# Altium PCB GPS_1.2.PcbDoc (part 2 of 2)
Units mil, origin at the board's own origin, x right, y up, seen from the top; angles counter-clockwise.
Board outline 1890 x 2770 mil, 4 copper layers (Top Layer, GND, VDD, Bottom Layer); 61 components, 50 nets, 274 pads, 157 vias.
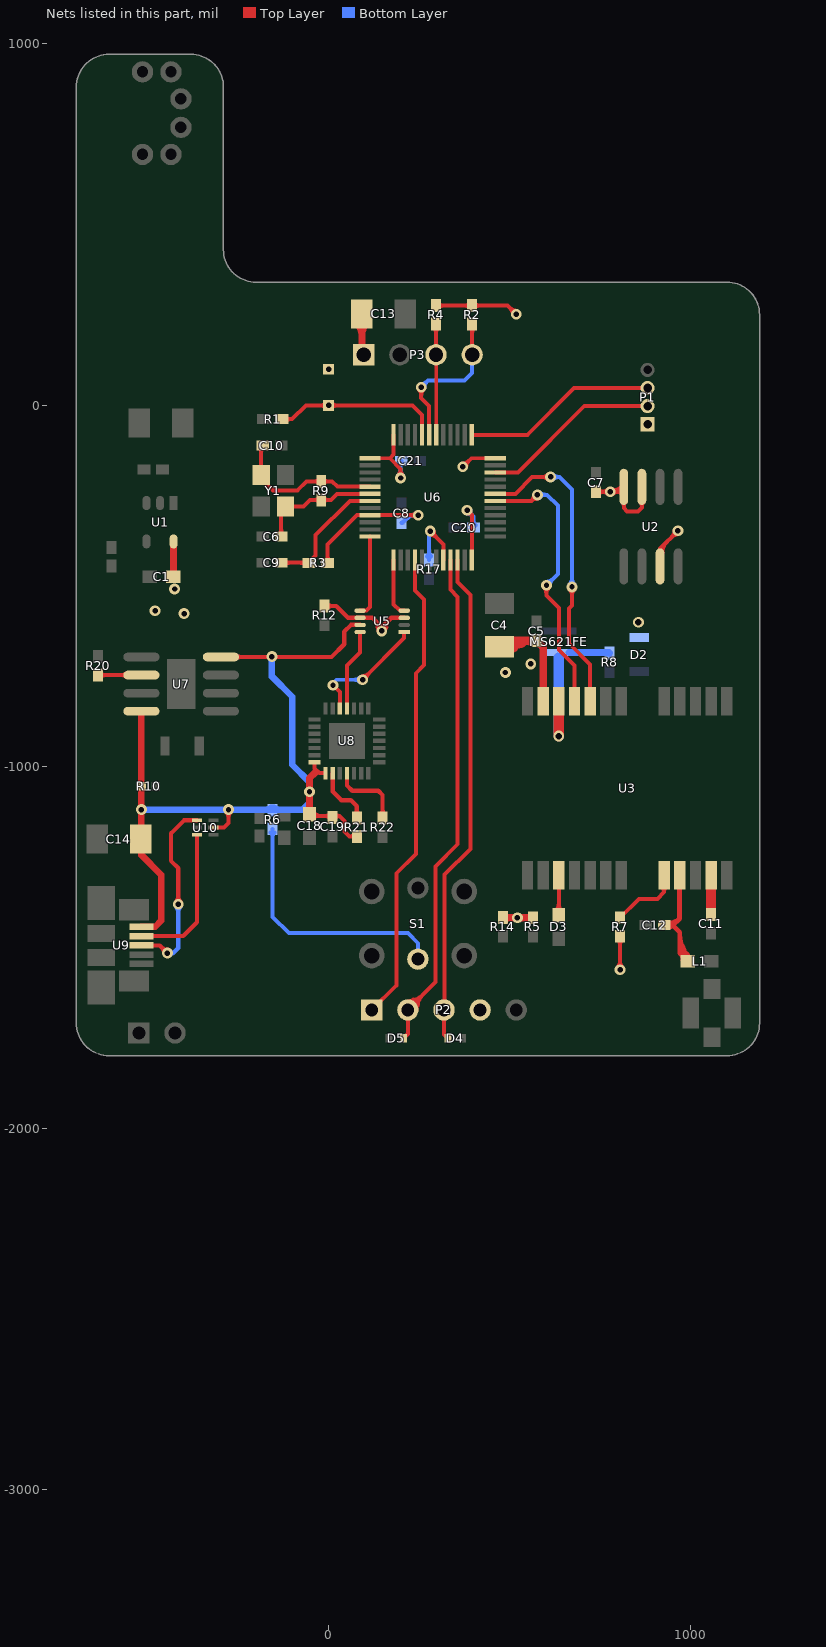
[diagram p4: the nets of this part, all layers, seen from the top]

## Via types
v1: diameter 30, hole 15, Top Layer to Bottom Layer, 153 vias
v2: diameter 30, hole 18, Top Layer to Bottom Layer, 4 vias

## Nets (pads, with @x,y where several pads share a name; then routed paths per layer and width w, separated by ;. In a path a pad name is that pad's centre, name@x,y a point inside that pad or via, vN(x,y) a via of type N, cw(c..) or ccw(c..) an arc to the next point about the centre after c; other vN are vias at no path point) (continued)
NetD3_2: D3.2 U3.3 | length 201.4
  Top Layer w11: D3.2@636.61,-1409.7 U3.3@636.61,-1299.32 ; D3.2@627.51,-1399.33 ccw(c605.55,-1377.36) 636.61,-1377.36 cw(c605.55,-1377.36) D3.2@627.51,-1399.33 ; 636.61,-1380.33 ccw(c663.49,-1380.33) 644.49,-1399.33 cw(c663.49,-1380.33) 636.61,-1380.33
NetMS621FE_2: MS621FE.2 R8.2 U3.22 | length 425.5
  Top Layer w30: v2(636.61,-914.61) U3.22@636.61,-819
  Bottom Layer w20: MS621FE.2@664.5,-683.5 775.09,-683.5 R8.2@777,-685.41
  Bottom Layer w30: v2(636.61,-914.61) 636.61,-698
NetR1_1: pad.1 R1.1 U6.44 | length 603.6
  Top Layer w11: R1.1@-128.81,-38 -101,-38 -63,0 232,0 258.2,-26.2 U6.44@258.2,-81.35 ; pad.1@-6.72,-6.72 ccw(c-22.94,-22.93) -22.94,0 ccw(c-22.94,22.93) pad.1@-6.72,6.72 ; pad.1@6.72,-6.72 cw(c22.94,-22.93) 22.94,0 cw(c22.94,22.93) pad.1@6.72,6.72 ; -104.89,-38 cw(c-104.89,-18.01) -119.02,-32.15 ccw(c-104.89,-18.01) -104.89,-38 ; -104.89,-38 ccw(c-104.89,-57.99) -119.02,-43.85 cw(c-104.89,-57.99) -104.89,-38
NetR6_2: R6.2 S1.6 | length 782.6
  Bottom Layer w11: R6.2@-155,-1171.18 -155,-1415 -110,-1460 219,-1460 246.88,-1487.88 S1.6@246.88,-1531.83 ; -155,-1195.11 cw(c-135.01,-1195.11) -149.15,-1180.97 ccw(c-135.01,-1195.11) -155,-1195.11 ; -155,-1195.11 ccw(c-174.99,-1195.11) -160.85,-1180.97 cw(c-174.99,-1195.11) -155,-1195.11
NetR7_1: R7.1 U3.8 | length 268.1
  Top Layer w11: R7.1@806,-1417.32 858.31,-1365 909,-1365 927.95,-1346.05 ; U3.8@927.95,-1299.32 927.95,-1346.05 ; 927.95,-1346.05 cw(c948.88,-1346.05) 934.83,-1330.53 ccw(c948.88,-1346.05) 927.95,-1346.05 ; 927.95,-1346.05 ccw(c907.02,-1346.05) 921.07,-1330.53 cw(c907.02,-1346.05) 927.95,-1346.05
NetR17_1: R17.1 U6.20 | length 327.8
  Top Layer w11: v1@279.53,-348.3 ccw(c294.61,-345.21) 290.62,-360.08 ; v1(281,-348) 317.26,-384.26 U6.20@317.26,-427.81 ; 297.22,-364.22 cw(c313.44,-348) 290.5,-348 ccw(c313.44,-348) 297.22,-364.22 ; 297.22,-364.22 ccw(c281,-380.43) 281,-357.5 cw(c281,-380.43) 297.22,-364.22
  Bottom Layer w11: R17.1@277.89,-427.81 277.89,-351.11 v1(281,-348) ; 277.89,-403.89 cw(c257.9,-403.89) 272.04,-418.02 ccw(c257.9,-403.89) 277.89,-403.89 ; 277.89,-403.89 ccw(c297.88,-403.89) 283.74,-418.02 cw(c297.88,-403.89) 277.89,-403.89
NetR20_2: R20.2 U7.2 | length 224.3
  Top Layer w12: R20.2@-637.82,-746 U7.2@-518,-746 ; -570.49,-746 cw(c-570.49,-760.49) -560.24,-750.24 ccw(c-570.49,-760.49) -570.49,-746 ; -570.49,-746 ccw(c-570.49,-731.51) -560.24,-741.76 cw(c-570.49,-731.51) -570.49,-746 ; R20.2@-632.5,-751.68 cw(c-618.78,-765.4) -618.78,-746 ccw(c-618.78,-765.4) R20.2@-632.5,-751.68 ; R20.2@-632.5,-740.68 ccw(c-619.66,-727.84) -619.66,-746 cw(c-619.66,-727.84) R20.2@-632.5,-740.68
NetR21_1: R21.1 U8.9 | length 225.4
  Top Layer w12: U8.9@11.13,-1017.56 11.13,-1068.13 35,-1092 61,-1092 78,-1109 R21.1@78,-1141 ; 78,-1118.28 cw(c59.22,-1118.28) 72.5,-1131.56 ccw(c59.22,-1118.28) 78,-1118.28 ; 78,-1118.28 ccw(c96.78,-1118.28) 83.5,-1131.56 cw(c96.78,-1118.28) 78,-1118.28
NetR22_1: R22.1 U8.11 | length 265.4
  Top Layer w12: U8.11@50.5,-1017.56 50.5,-1051.5 65,-1066 137,-1066 149,-1078 R22.1@149,-1141 ; 149,-1118.28 cw(c130.22,-1118.28) 143.5,-1131.56 ccw(c130.22,-1118.28) 149,-1118.28 ; 149,-1118.28 ccw(c167.78,-1118.28) 154.5,-1131.56 cw(c167.78,-1118.28) 149,-1118.28
NetU9_2: U9.2 U10.3 | length 408.7
  Top Layer w12: U9.2@-518,-1468 -402,-1468 -364,-1430 U10.3@-364,-1191
NetU9_3: U9.3 U10.1 | length 905.8
  Top Layer w12: U9.3@-518,-1494 -467,-1494 v1(-446,-1515) ; v1@-455,-1514.77 ccw(c-474.95,-1514.27) -461,-1499.99 ccw(c-446.73,-1486.05) v1@-446.23,-1506 ; v1@-446.07,-1506 cw(c-446.24,-1484.85) -461.37,-1499.63 ; v1(-416,-1380) -416,-1280 -436,-1260 -436,-1184 -400,-1148 U10.1@-364,-1148 ; -461.36,-1499.64 cw(c-476.73,-1515) -455,-1515 ccw(c-476.73,-1515) -461.36,-1499.64 ; -461.36,-1499.64 ccw(c-446,-1484.27) -446,-1506 cw(c-446,-1484.27) -461.36,-1499.64 ; -461.37,-1499.63 cw(c-476.15,-1514.76) v1@-455,-1514.93 ; -460.93,-1500.06 ccw(c-446.35,-1485.14) -446.1,-1506 cw(c-446.35,-1485.14) -460.93,-1500.06 ; -460.94,-1500.07 cw(c-475.86,-1514.65) v1@-455,-1514.9 ; -460.94,-1500.07 cw(c-475.86,-1514.65) v1@-455,-1514.9 ; -416,-1358.27 cw(c-437.73,-1358.27) -422.36,-1373.64 ccw(c-437.73,-1358.27) -416,-1358.27 ; -416,-1358.27 ccw(c-394.27,-1358.27) -409.64,-1373.64 cw(c-394.27,-1358.27) -416,-1358.27
  Bottom Layer w12: v1(-446,-1515) -430,-1515 ; v1(-416,-1380) -416,-1501 -430,-1515 ; -430,-1515 cw(c-430,-1505.28) -438.31,-1510.33 ccw(c-430,-1505.28) -430,-1515 ; -430,-1515 ccw(c-430,-1524.72) -438.31,-1519.67 cw(c-430,-1524.72) -430,-1515 ; -416,-1401.73 cw(c-394.27,-1401.73) -409.64,-1386.36 ccw(c-394.27,-1401.73) -416,-1401.73 ; -416,-1401.73 ccw(c-437.73,-1401.73) -422.36,-1386.36 cw(c-437.73,-1401.73) -416,-1401.73
NRST: C9.2 R3.1 U6.7 | length 477.3
  Top Layer w11: C9.2@-131.31,-435.32 -54.69,-435.32 R3.1@-54,-436 -54,-433.73 -36,-415.73 -36,-359 58.57,-264.43 U6.7@114.5,-264.43 ; -107.39,-435.32 cw(c-107.39,-415.33) -121.52,-429.46 ccw(c-107.39,-415.33) -107.39,-435.32 ; -107.39,-435.32 ccw(c-107.39,-455.3) -121.52,-441.17 cw(c-107.39,-455.3) -107.39,-435.32 ; -79.58,-435.32 cw(c-79.58,-457.64) -63.79,-441.85 ccw(c-79.58,-457.64) -79.58,-435.32 ; -76.27,-435.32 ccw(c-76.27,-417.67) -63.79,-430.15 cw(c-76.27,-417.67) -76.27,-435.32
OSC_IN: C10.2 R9.1 U6.5 Y1.3 | length 613.5
  Top Layer w11: C10.2@-182.5,-111.32 -186.73,-115.55 Y1.3@-186.73,-192.35 -186.73,-203.27 -154.15,-235.85 -86.85,-235.85 -61.31,-210.32 R9.1@-20.5,-210.32 9.31,-210.32 24.06,-225.05 U6.5@114.5,-225.05 ; -40.48,-210.32 cw(c-40.48,-230.3) -26.35,-216.17 ccw(c-40.48,-230.3) -40.48,-210.32 ; -40.48,-210.32 ccw(c-40.48,-190.33) -26.35,-204.46 cw(c-40.48,-190.33) -40.48,-210.32 ; -0.51,-210.32 cw(c-0.51,-190.33) -14.64,-204.46 ccw(c-0.51,-190.33) -0.51,-210.32 ; -0.51,-210.32 ccw(c-0.51,-230.3) -14.64,-216.17 cw(c-0.51,-230.3) -0.51,-210.32 ; C10.2@-192.29,-117.17 cw(c-205.7,-130.58) -186.73,-130.58 ccw(c-205.7,-130.58) C10.2@-192.29,-117.17 ; -186.73,-132.03 cw(c-165.72,-132.03) -180.58,-117.17 ccw(c-165.72,-132.03) -186.73,-132.03
OSC_OUT: C6.2 R9.2 U6.6 Y1.1 | length 525.3
  Top Layer w11: C6.2@-131.31,-363.32 -131.31,-291.7 Y1.1@-119.27,-279.65 -69.65,-279.65 -51.5,-261.5 R9.2@-20.5,-261.5 6.5,-261.5 23.26,-244.74 U6.6@114.5,-244.74 ; -131.31,-343.33 cw(c-151.3,-343.33) -137.17,-357.46 ccw(c-151.3,-343.33) -131.31,-343.33 ; -131.32,-343.33 ccw(c-111.33,-343.33) -125.46,-357.46 cw(c-111.33,-343.33) -131.32,-343.33 ; -40.48,-261.5 cw(c-40.48,-281.48) -26.35,-267.35 ccw(c-40.48,-281.48) -40.48,-261.5 ; -40.48,-261.5 ccw(c-40.48,-241.51) -26.35,-255.64 cw(c-40.48,-241.51) -40.48,-261.5 ; -0.51,-261.5 cw(c-0.51,-241.51) -14.64,-255.64 ccw(c-0.51,-241.51) -0.51,-261.5 ; -0.51,-261.5 ccw(c-0.51,-281.48) -14.64,-267.35 cw(c-0.51,-281.48) -0.51,-261.5
RF_IN: C11.2 U3.11 | length 108.9
  Top Layer w13: C11.2@1057.87,-1408.01 C11.2@1058,-1408.13
  Top Layer w28: C11.2@1057.87,-1408.01 U3.11@1057.87,-1299.32
RF_VCC: C12.2 L1.2 U3.9 | length 823.9
  Top Layer w13: C12.2@928.18,-1438 952,-1438 ; U3.9@971.26,-1299.32 970.5,-1300.08 970.5,-1419.5 ; 973.72,-1511.93 ccw(c1002.43,-1495.35) L1.2@993.85,-1527.37 ; 977.53,-1493.42 cw(c936.52,-1517.09) L1.2@980.73,-1534.06 ; 978.38,-1520.01 cw(c961.09,-1529.99) L1.2@980.37,-1535.15 ; 991.16,-1517.02 cw(c969.27,-1529.66) L1.2@992.87,-1538.72 ; L1.2@993.5,-1538 971.26,-1515.76 971.26,-1457.26 952,-1438 ; 949.69,-1438 cw(c949.69,-1420.43) 937.27,-1432.85 ccw(c949.69,-1420.43) 949.69,-1438 ; 949.69,-1438 ccw(c949.69,-1455.57) 937.27,-1443.15 cw(c949.69,-1455.57) 949.69,-1438 ; 952,-1438 970.5,-1419.5 ; 970.5,-1419.5 cw(c941.3,-1390.3) 933.49,-1430.85 ccw(c941.3,-1390.3) 970.5,-1419.5 ; C12.2@931.04,-1443.62 ccw(c935.71,-1419.36) 953.17,-1436.83 cw(c935.71,-1419.36) C12.2@931.04,-1443.62 ; 971.26,-1495.17 ccw(c1033.83,-1495.17) 989.59,-1539.41 cw(c1033.83,-1495.17) 971.26,-1495.17 ; 971.26,-1463.79 ccw(c1065.21,-1463.79) 998.78,-1530.22 cw(c1065.21,-1463.79) 971.26,-1463.79
RXD_G: U3.21 U6.30 | length 1101.9
  Top Layer w11: U6.30@460.96,-264.43 560.57,-264.43 v1(577.5,-247.5) ; 565.42,-257.12 cw(c580.29,-261.11) v1@577.2,-246.03 ; 567.88,-259.58 ccw(c563.89,-244.71) v1@578.97,-247.8 ; v1@602,-497.5 602,-526 637,-561 637,-677 679.92,-719.92 U3.21@679.92,-819 ; 561.28,-263.72 cw(c577.5,-279.93) 577.5,-257 ccw(c577.5,-279.93) 561.28,-263.72 ; 561.28,-263.72 ccw(c545.06,-247.5) 568,-247.5 cw(c545.06,-247.5) 561.28,-263.72 ; v1@595.78,-504.22 cw(c580.77,-519.23) 602,-519.23 ccw(c580.77,-519.23) v1@595.78,-504.22 ; 602,-521.64 cw(c626.64,-521.64) 609.22,-504.22 ccw(c626.64,-521.64) 602,-521.64
  Bottom Layer w11: v1(577.5,-247.5) 604.5,-247.5 634,-277 634,-466 v1(602.5,-497.5) ; 600.44,-247.5 cw(c600.44,-224.57) 584.22,-240.78 ccw(c600.44,-224.57) 600.44,-247.5 ; 600.44,-247.5 ccw(c600.44,-270.43) 584.22,-254.22 cw(c600.44,-270.43) 600.44,-247.5 ; 618.72,-481.28 cw(c602.5,-465.07) 602.5,-488 ccw(c602.5,-465.07) 618.72,-481.28 ; 618.72,-481.28 ccw(c634.94,-497.5) 612,-497.5 cw(c634.94,-497.5) 618.72,-481.28
RXD_MCU: U5.4 U6.13 | length 159.4
  Top Layer w11: U6.13@179.46,-427.81 179.46,-550.46 196.94,-567.95 U5.4@209,-567.95
RXD_S: D4.2 P2.3 U6.22 | length 1397.4
  Top Layer w11: D4.2@330.31,-1751 319,-1739.69 P2.3@319,-1672.31 321,-1670.32 321,-1298 392,-1227 392,-524 356.63,-488.63 U6.22@356.63,-427.81 ; 319.22,-1739.9 ccw(c330.31,-1728.81) 330.31,-1744.5 cw(c330.31,-1728.81) 319.22,-1739.9
RXD_USB: U5.1 U8.26 | length 504.3
  Top Layer w11: v1(12,-774) 30.82,-792.82 U8.26@30.82,-838.56 ; v1@92.53,-758.7 cw(c107.61,-761.79) 103.62,-746.92 ; v1(94,-759) 209,-644 U5.1@209,-627 ; 110.22,-742.78 cw(c94,-726.57) 94,-749.5 ccw(c94,-726.57) 110.22,-742.78 ; 110.22,-742.78 ccw(c126.44,-759) 103.5,-759 cw(c126.44,-759) 110.22,-742.78
  Bottom Layer w11: v1(12,-774) 12,-769 22,-759 v1(94,-759) ; 71.06,-759 cw(c71.06,-781.93) 87.28,-765.72 ccw(c71.06,-781.93) 71.06,-759 ; 71.06,-759 ccw(c71.06,-736.07) 87.28,-752.28 cw(c71.06,-736.07) 71.06,-759
S_EN: P2.1 U6.16 | length 1315.1
  Top Layer w11: P2.1@119,-1672.31 187,-1604.32 187,-1295 241,-1241 241,-741 264,-718 264,-537 238.52,-511.52 U6.16@238.52,-427.81
SCL: P3.3 R4.1 U6.42 | length 369.2
  Top Layer w11: P3.3@296.88,140 297,140.12 R4.1@297,225 ; U6.42@297.57,-81.35 P3.3@297.57,139.99 ; 297,201.07 cw(c316.99,201.07) 302.85,215.21 ccw(c316.99,201.07) 297,201.07 ; 297,201.07 ccw(c277.01,201.07) 291.15,215.21 cw(c277.01,201.07) 297,201.07
SDA: P3.4 R2.1 U6.43 | length 640.6
  Top Layer w11: v1(256,50) 256,20 277.89,-1.89 U6.43@277.89,-81.35 ; P3.4@396.88,140 397,140.12 R2.1@397,225 ; 256,27.07 cw(c278.94,27.07) 262.72,43.28 ccw(c278.94,27.07) 256,27.07 ; 256,27.07 ccw(c233.06,27.07) 249.28,43.28 cw(c233.06,27.07) 256,27.07 ; 397,201.07 cw(c416.99,201.07) 402.85,215.21 ccw(c416.99,201.07) 397,201.07 ; 397,201.07 ccw(c377.01,201.07) 391.15,215.21 cw(c377.01,201.07) 397,201.07
  Bottom Layer w11: v1(256,50) 275,69 376,69 396.88,89.88 P3.4@396.88,140 P3.4@396.88,140.68 ; 272.22,66.22 cw(c256,82.43) 256,59.5 ccw(c256,82.43) 272.22,66.22 ; 272.22,66.22 ccw(c288.44,50) 265.5,50 cw(c288.44,50) 272.22,66.22
SWCLK: P1.3 U6.37 | length 539.6
  Top Layer w11: U6.37@396,-81.35 549.65,-81.35 679,48 P1.3@882,48
SWDIO: P1.2 U6.34 | length 497.1
  Top Layer w11: U6.34@460.96,-185.68 523.31,-185.68 707,-2 P1.2@882,-2
TXD_G: U3.20 U6.31 | length 1147.5
  Top Layer w11: U6.31@460.96,-244.74 516.26,-244.74 563,-198 v1(614,-198) ; v1(673,-502) 673,-554 665,-562 665,-658 723.23,-716.23 U3.20@723.23,-819 ; 591.06,-198 cw(c591.06,-220.93) 607.28,-204.72 ccw(c591.06,-220.93) 591.06,-198 ; 591.06,-198 ccw(c591.06,-175.07) 607.28,-191.28 cw(c591.06,-175.07) 591.06,-198 ; 673,-524.93 cw(c695.94,-524.93) 679.72,-508.72 ccw(c695.94,-524.93) 673,-524.93 ; 673,-524.93 ccw(c650.06,-524.93) 666.28,-508.72 cw(c650.06,-524.93) 673,-524.93
  Bottom Layer w11: v1(614,-198) 638,-198 673,-233 v1(673,-502) ; 636.94,-198 cw(c636.94,-175.07) 620.72,-191.28 ccw(c636.94,-175.07) 636.94,-198 ; 636.94,-198 ccw(c636.94,-220.93) 620.72,-204.72 cw(c636.94,-220.93) 636.94,-198 ; 673,-479.07 cw(c650.06,-479.07) 666.28,-495.28 ccw(c650.06,-479.07) 673,-479.07 ; 673,-479.07 ccw(c695.94,-479.07) 679.72,-495.28 cw(c695.94,-479.07) 673,-479.07
TXD_MCU: U5.5 U6.12 | length 226.5
  Top Layer w11: U5.5@86.95,-567.95 104.06,-567.95 114.5,-557.5 U6.12@114.5,-362.85
TXD_S: D5.2 P2.2 U6.21 | length 1873
  Top Layer w11: D5.2@206.69,-1751 219,-1738.68 P2.2@219,-1672.31 296,-1595.32 296,-1275 357,-1214 357,-530 336.94,-509.94 U6.21@336.94,-427.81 ; P2.2@210.21,-1670.51 cw(c244.24,-1677.48) 235.25,-1643.93 ; P2.2@218.59,-1670.33 ccw(c209.84,-1627.58) 251.99,-1638.87 ; P2.2@220.8,-1681.1 ccw(c213.83,-1647.08) 247.38,-1656.07 ; P2.2@220.99,-1672.72 cw(c263.73,-1681.48) 252.44,-1639.33 ; 241.24,-1650.08 cw(c219,-1627.84) 219,-1659.29 ccw(c219,-1627.84) 241.24,-1650.08 ; 241.24,-1650.08 ccw(c263.48,-1672.31) 232.03,-1672.31 cw(c263.48,-1672.31) 241.24,-1650.08 ; 260.02,-1631.3 cw(c219,-1590.28) 219,-1648.29 ccw(c219,-1590.28) 260.02,-1631.3 ; 260.02,-1631.3 ccw(c301.04,-1672.31) 243.03,-1672.31 cw(c301.04,-1672.31) 260.02,-1631.3 ; D5.2@206.69,-1744.5 ccw(c206.69,-1728.81) 217.78,-1739.9 cw(c206.69,-1728.81) D5.2@206.69,-1744.5
TXD_USB: U5.8 U8.25 | length 226.7
  Top Layer w11: U8.25@50.5,-838.56 50.5,-719.5 86.95,-683.05 U5.8@86.95,-627
USB-VBUS: C14.1 C18.1 C19.1 R6.1 R10.2 R21.2 U5.7 U7.4 U7.8 U8.7 U8.8 U9.1 U10.5 | length 2961.8
  Top Layer w11: U10.5@-318.72,-1167.68 -289.69,-1167.68 ; -289.69,-1167.61 -277,-1154.92 v1(-277,-1118) ; C18.1@-53,-1125.5 -42.5,-1136 30,-1136 ; U8.7@-39,-987.11 -39,-1004.11 -25.56,-1017.56 U8.8@-9.87,-1017.56 ; R21.2@78,-1192.18 57.18,-1192.18 44,-1179 44,-1150 30,-1136 ; -277,-1140.93 cw(c-254.06,-1140.93) -270.28,-1124.72 ccw(c-254.06,-1140.93) -277,-1140.93 ; -277,-1140.93 ccw(c-299.94,-1140.93) -283.72,-1124.72 cw(c-299.94,-1140.93) -277,-1140.93 ; 30,-1136 cw(c30,-1118.21) 17.03,-1130.39 ccw(c30,-1118.21) 30,-1136 ; 30,-1136 ccw(c30,-1153.53) 17.1,-1141.67 cw(c30,-1153.53) 30,-1136 ; 58.01,-1192.18 cw(c58.01,-1212.17) 72.15,-1198.04 ccw(c58.01,-1212.17) 58.01,-1192.18 ; 58.01,-1192.18 ccw(c58.01,-1172.19) 72.15,-1186.33 cw(c58.01,-1172.19) 58.01,-1192.18 ; C18.1@-44.51,-1141.49 cw(c-31.27,-1154.73) -31.27,-1136 ccw(c-31.27,-1154.73) C18.1@-44.51,-1141.49 ; C18.1@-44.51,-1124.51 ccw(c-16.79,-1096.79) -16.79,-1136 cw(c-16.79,-1096.79) C18.1@-44.51,-1124.51 ; -9.14,-1136 cw(c-9.14,-1156.2) 5.15,-1141.92 ccw(c-9.14,-1156.2) -9.14,-1136 ; -8.84,-1136 ccw(c-8.84,-1116.23) 5.15,-1130.21 cw(c-8.84,-1116.23) -8.84,-1136
  Top Layer w12: U7.8@-298,-696 8,-696 43,-661 43,-625.89 61.57,-607.32 U5.7@86.95,-607.32 ; -245.51,-696 cw(c-245.51,-681.51) -255.76,-691.76 ccw(c-245.51,-681.51) -245.51,-696 ; -245.51,-696 ccw(c-245.51,-710.49) -255.76,-700.24 cw(c-245.51,-710.49) -245.51,-696
  Top Layer w18: U9.1@-518,-1442 -480,-1442 -463,-1425 -463,-1299 -518,-1244 v1(-518,-1118) U7.4@-518,-846
  Top Layer w20: C18.1@-53,-1125.5 v1(-53,-1069) -53,-1031 -36.5,-1014.5 ; -53,-1109.89 cw(c-71.11,-1109.89) -58.3,-1122.7 ccw(c-71.11,-1109.89) -53,-1109.89 ; -53,-1109.89 ccw(c-34.89,-1109.89) -47.7,-1122.7 cw(c-34.89,-1109.89) -53,-1109.89
  Bottom Layer w18: v1(-518,-1118) v1(-277,-1118) -71,-1118 -53,-1100 v1(-53,-1069) -53,-1042 -101,-994 -101,-806 -157,-750 v1(-157,-695) ; -171.22,-1118 ccw(c-171.22,-1099.85) -158.38,-1112.68 cw(c-171.22,-1099.85) -171.22,-1118 ; R6.1@-151.62,-1112.68 ccw(c-138.78,-1099.85) -138.78,-1118 cw(c-138.78,-1099.85) R6.1@-151.62,-1112.68
VDD: C1.2 C4.1 C5.1 C7.1 C8.1 C13.2 C20.1 C21.1 D2.A P1.1 P2.4 P3.1 pad.0 R2.2 R3.2 R4.2 R5.1 R7.2 R12.1 R14.1 U1.5 U2.3 U2.7 U2.8 U3.23 U5.3 U5.6 U6.1 U6.9 U6.24 U6.36 U6.48 | length 5201.4
  Top Layer w11: R3.2@-2.82,-436 -2.82,-384.82 78.2,-303.8 U6.9@114.5,-303.8 v1(247.8,-303.8) ; U6.1@114.5,-146.32 169.31,-146.32 ; U6.48@179.46,-81.35 179.46,-136.17 169.31,-146.32 ; v1(199,-201) 199,-176 169.31,-146.32 ; v1(371,-170) 394.69,-146.32 U6.36@460.96,-146.32 ; v1(383,-290) 396,-303 ; U6.24@396,-427.81 396,-303 ; C7.1@740,-239 v1(779,-239) ; 796.76,-234.44 cw(c807.95,-247.04) U2.8@814.12,-231.36 ; v1(806,-1561) R7.2@806,-1468.5 ; U2.8@816.5,-225.32 802.82,-239 ; U2.7@866.5,-225.32 866.5,-282.5 856,-293 825,-293 816.5,-284.5 816.5,-252.68 802.82,-239 ; U2.3@916.5,-445.32 916.5,-396.5 v1(966,-347) ; 956.38,-359.08 ccw(c952.39,-344.21) v1@967.47,-347.3 ; -2.82,-416.01 cw(c-22.81,-416.01) -8.67,-430.15 ccw(c-22.81,-416.01) -2.82,-416.01 ; -2.82,-416.01 ccw(c17.17,-416.01) 3.04,-430.15 cw(c17.17,-416.01) -2.82,-416.01 ; 199,-178.07 cw(c176.06,-178.07) 192.28,-194.28 ccw(c176.06,-178.07) 199,-178.07 ; 199,-178.07 ccw(c221.94,-178.07) 205.72,-194.28 cw(c221.94,-178.07) 199,-178.07 ; 224.86,-303.8 cw(c224.86,-326.73) 241.08,-310.51 ccw(c224.86,-326.73) 224.86,-303.8 ; 224.86,-303.8 ccw(c224.86,-280.86) 241.08,-297.08 cw(c224.86,-280.86) 224.86,-303.8 ; 387.22,-153.78 cw(c371,-137.57) 371,-160.5 ccw(c371,-137.57) 387.22,-153.78 ; 387.22,-153.78 ccw(c403.44,-170) 380.5,-170 cw(c403.44,-170) 387.22,-153.78 ; 396,-303 cw(c405.22,-293.78) 392.37,-291.59 ccw(c405.22,-293.78) 396,-303 ; 396,-303 ccw(c386.78,-312.22) 384.59,-299.37 cw(c386.78,-312.22) 396,-303 ; 756.06,-239 cw(c756.06,-261.93) 772.28,-245.72 ccw(c756.06,-261.93) 756.06,-239 ; 756.06,-239 ccw(c756.06,-216.07) 772.28,-232.28 cw(c756.06,-216.07) 756.06,-239 ; 759.99,-239 cw(c759.99,-219.01) 745.85,-233.15 ccw(c759.99,-219.01) 759.99,-239 ; 759.99,-239 ccw(c759.99,-258.99) 745.85,-244.85 cw(c759.99,-258.99) 759.99,-239 ; v1(779,-239) ccw(c779,-200.57) 811.08,-221.74 cw(c779,-200.57) v1(779,-239) ; v1(779,-239) 802.82,-239 ; v1@784.59,-231.32 ccw(c794.05,-218.32) 798.22,-233.85 ; v1@784.59,-231.32 ccw(c794.05,-218.32) 798.22,-233.85 ; v1@784.59,-231.32 ccw(c794.05,-218.32) 798.22,-233.85 ; v1@787.68,-242.86 cw(c802.38,-249.38) 798.22,-233.85 ; v1@787.68,-242.86 cw(c802.38,-249.38) 798.22,-233.85 ; v1@787.68,-242.86 cw(c802.38,-249.38) 798.22,-233.85 ; 801.94,-239 cw(c801.94,-216.07) 785.72,-232.28 ccw(c801.94,-216.07) 801.94,-239 ; 801.94,-239 ccw(c801.94,-261.93) 785.72,-245.72 cw(c801.94,-261.93) 801.94,-239 ; U2.8@805.41,-236.41 cw(c816.5,-247.51) 816.5,-231.82 ccw(c816.5,-247.51) U2.8@805.41,-236.41 ; U2.8@805.41,-236.41 ccw(c794.31,-225.32) 810,-225.32 cw(c794.31,-225.32) U2.8@805.41,-236.41 ; 806,-1538.07 cw(c783.06,-1538.07) 799.28,-1554.28 ccw(c783.06,-1538.07) 806,-1538.07 ; 806,-1538.07 ccw(c828.94,-1538.07) 812.72,-1554.28 cw(c828.94,-1538.07) 806,-1538.07 ; 806,-1492.42 cw(c825.99,-1492.42) 811.85,-1478.29 ccw(c825.99,-1492.42) 806,-1492.42 ; 806,-1492.42 ccw(c786.01,-1492.42) 800.15,-1478.29 cw(c786.01,-1492.42) 806,-1492.42 ; 816.5,-279.01 cw(c832.2,-279.01) 821.1,-267.91 ccw(c832.2,-279.01) 816.5,-279.01 ; 816.5,-279.01 ccw(c800.81,-279.01) 811.91,-267.91 cw(c800.81,-279.01) 816.5,-279.01 ; 866.5,-279.01 cw(c882.2,-279.01) 871.1,-267.91 ccw(c882.2,-279.01) 866.5,-279.01 ; 866.5,-279.01 ccw(c850.81,-279.01) 861.91,-267.91 cw(c850.81,-279.01) 866.5,-279.01 ; 949.78,-363.22 cw(c966,-379.43) 966,-356.5 ccw(c966,-379.43) 949.78,-363.22 ; 949.78,-363.22 ccw(c933.56,-347) 956.5,-347 cw(c933.56,-347) 949.78,-363.22 ; 799.44,-239 ccw(c799.44,-214.05) 820.26,-227.79 cw(c799.44,-214.05) 799.44,-239 ; U2.3@923,-407.32 cw(c964.82,-407.32) 935.25,-377.75 ccw(c964.82,-407.32) U2.3@923,-407.32
  Top Layer w12: R12.1@-11,-555 21,-555 53.63,-587.63 U5.6@86.95,-587.63 121,-587.63 v1@147,-613.63 ; 135.14,-613.32 ccw(c155.98,-607.74) v1@145.55,-626.63 ; v1(147,-624) v1@147,-613.63 ; v1@148.45,-626.63 ccw(c138.02,-607.74) 158.86,-613.32 ; U5.3@209,-587.63 173,-587.63 v1@147,-613.63 ; R4.2@297,276.18 R2.2@397,276.18 494.82,276.18 v1(519,252) ; v1@510,252.23 ccw(c490.05,252.73) 504,267.01 ccw(c518.27,280.95) v1@518.77,261 ; v1@518.93,261 cw(c518.76,282.15) 503.63,267.37 ; 7.78,-555 cw(c7.78,-536.22) -5.5,-549.5 ccw(c7.78,-536.22) 7.78,-555 ; 7.78,-555 ccw(c7.78,-573.78) -5.5,-560.5 cw(c7.78,-573.78) 7.78,-555 ; 315.78,276.18 cw(c315.78,294.96) 302.5,281.68 ccw(c315.78,294.96) 315.78,276.18 ; 315.78,276.18 ccw(c315.78,257.4) 302.5,270.68 cw(c315.78,257.4) 315.78,276.18 ; 378.22,276.18 cw(c378.22,257.4) 391.5,270.68 ccw(c378.22,257.4) 378.22,276.18 ; 378.22,276.18 ccw(c378.22,294.96) 391.5,281.68 cw(c378.22,294.96) 378.22,276.18 ; 415.78,276.18 cw(c415.78,294.96) 402.5,281.68 ccw(c415.78,294.96) 415.78,276.18 ; 415.78,276.18 ccw(c415.78,257.4) 402.5,270.68 cw(c415.78,257.4) 415.78,276.18 ; 503.64,267.36 cw(c488.27,252) 510,252 ccw(c488.27,252) 503.64,267.36 ; 503.64,267.36 ccw(c519,282.73) 519,261 cw(c519,282.73) 503.64,267.36 ; 503.63,267.37 cw(c488.85,252.24) v1@510,252.07 ; 504.07,266.94 ccw(c518.65,281.86) 518.9,261 cw(c518.65,281.86) 504.07,266.94 ; 504.06,266.93 cw(c489.14,252.35) v1@510,252.1 ; 504.06,266.93 cw(c489.14,252.35) v1@510,252.1 ; 124.3,-590.93 cw(c91.24,-624) 138,-624 ccw(c91.24,-624) 124.3,-590.93 ; v1@156,-624 cw(c202.76,-624) 169.7,-590.93 ccw(c202.76,-624) v1@156,-624
  Top Layer w20: C1.2@-429,-473.5 U1.5@-429,-376.3 ; C13.2@92,253 92,144.88 P3.1@96.88,140 ; C4.1@473,-668 491,-650 C5.1@575,-650 593.31,-668.31 U3.23@593.31,-819 ; R14.1@482.31,-1417.32 v1(522,-1417.32) R5.1@565,-1417.32 ; C4.1@483.14,-668.34 ccw(c501.05,-650.18) 513.8,-672.27 ; C4.1@497.19,-654.1 ccw(c520.17,-630.81) 536.53,-659.15 ; 92,195.38 cw(c139.14,195.38) 105.81,228.72 ccw(c139.14,195.38) 92,195.38 ; 92,195.38 ccw(c44.86,195.38) 78.19,228.72 cw(c44.86,195.38) 92,195.38 ; C1.2@-434.8,-468.7 ccw(c-448.81,-454.69) -429,-454.69 cw(c-448.81,-454.69) C1.2@-434.8,-468.7 ; C4.1@483.14,-667.67 cw(c525.79,-710.32) 525.79,-650 ccw(c525.79,-710.32) C4.1@483.14,-667.67 ; C4.1@497.28,-681.81 cw(c574.07,-758.6) 574.07,-650 ccw(c574.07,-758.6) C4.1@497.28,-681.81 ; 555.71,-654.92 cw(c561.65,-677.07) 573.11,-657.21 ccw(c561.65,-677.07) 555.71,-654.92 ; C5.1@574.8,-657.71 cw(c573.78,-677.21) 593.31,-677.21 ccw(c573.78,-677.21) C5.1@574.8,-657.71 ; C5.1@575,-657.72 cw(c575,-676.35) 588.17,-663.17 ccw(c575,-676.35) C5.1@575,-657.72
  Bottom Layer w11: v1(199,-201) 199,-155.32 C21.1@201,-153.32 ; v1(383,-290) 401,-308 C20.1@401,-338 ; 199,-178.07 cw(c176.06,-178.07) 192.28,-194.28 ccw(c176.06,-178.07) 199,-178.07 ; 199,-178.07 ccw(c221.94,-178.07) 205.72,-194.28 cw(c221.94,-178.07) 199,-178.07 ; 399.22,-306.22 cw(c415.44,-290) 392.5,-290 ccw(c415.44,-290) 399.22,-306.22 ; 399.22,-306.22 ccw(c383,-322.43) 383,-299.5 cw(c383,-322.43) 399.22,-306.22 ; 401,-318.01 cw(c381.01,-318.01) 395.15,-332.15 ccw(c381.01,-318.01) 401,-318.01 ; 401,-318.01 ccw(c420.99,-318.01) 406.85,-332.15 cw(c420.99,-318.01) 401,-318.01 ; C21.1@191.21,-159.17 cw(c172.4,-177.98) 199,-177.98 ccw(c172.4,-177.98) C21.1@191.21,-159.17 ; 199,-168.63 cw(c212.38,-168.63) 202.92,-159.17 ccw(c212.38,-168.63) 199,-168.63
  Bottom Layer w12: C8.1@202,-324.32 204.94,-324.32 225.46,-303.8 v1(247.8,-303.8)
  other v1: 489,-739 559,-715 -400,-576 -480,-568 -426,-508
  other v2: 857,-600
pads on no net: S1.0 S1.2 S1.4 S6.0 U3.1 U3.2 U3.4 U3.5 U3.6 U3.14 U3.15 U3.16 U3.17 U3.18 U3.19 U4.0@1001.93,-1681 U4.0@1118.07,-1681 U6.2 U6.3 U6.4 U6.10 U6.11 U6.14 U6.15 U6.18 U6.19 U6.32 U6.38 U6.39 U6.40 U6.41 U6.45 U6.46 U8.1 U8.2 U8.10 U8.12 U8.13 U8.14 U8.15 U8.16 U8.17 U8.18 U8.19 U8.20 U8.21 U8.22 U8.23 U8.24 U8.27 U8.28 U9.4
copper on no net: | length 51.7
  Top Layer w20: 1050.37,-1757.56 ccw(c1027.11,-1780.82) 1027.11,-1747.93 ccw(c1027.11,-1715.04) 1050.37,-1738.3

## Polygon pours and split planes (outlines as drawn)
GND on Top Layer "Top Layer-No Net" (solid, remove dead copper, pour order 2): -713,983 -713,-1812 1205,-1812 1205,355 944,355 -195,355 -195,987
GND on Bottom Layer "Top Layer-No Net" (solid, remove dead copper, pour order 3): -713,983 -713,-1812 1205,-1812 1205,355 944,355 -195,355 -195,987
GND on GND (split plane): -374.14,950.65 -367.35,949.64 -360.68,947.97 -354.22,945.66 -348.01,942.72 -342.12,939.19 -336.6,935.1 -331.51,930.49 -326.9,925.4 -322.81,919.88 -319.28,913.99 -316.34,907.78 -314.03,901.32 -312.36,894.65 -311.35,887.86 -311.04,881.55 -311.1,881 -311.1,430.68 -311.08,430.48 -310.75,422.05 -309.73,413.46 -308.04,404.99 -305.7,396.67 -302.71,388.56 -299.09,380.71 -294.86,373.17 -290.06,365.98 -284.71,359.19 -278.84,352.84 -272.49,346.98 -265.71,341.62 -258.52,336.82 -250.98,332.6 -243.13,328.98 -235.02,325.99 -226.7,323.64 -218.22,321.96 -209.64,320.94 -201.2,320.61 -201,320.59 1101.76,320.59 1102.31,320.64 1108.62,320.33 1115.42,319.32 1122.08,317.66 1128.55,315.34 1134.75,312.41 1140.65,308.87 1146.16,304.78 1151.25,300.17 1155.86,295.08 1159.95,289.57 1163.48,283.68 1166.42,277.47 1168.73,271 1170.4,264.34 1171.41,257.54 1171.72,251.23 1171.67,250.68 1171.67,-1709 1171.88,-1711.15 1171.65,-1715.86 1170.64,-1722.65 1168.97,-1729.32 1166.66,-1735.78 1163.72,-1741.99 1160.19,-1747.88 1156.1,-1753.4 1151.49,-1758.49 1146.4,-1763.1 1140.88,-1767.19 1134.99,-1770.72 1128.78,-1773.66 1122.32,-1775.97 1115.65,-1777.64 1108.86,-1778.65 1102.55,-1778.96 1102,-1778.9 -608,-1778.9 -608.55,-1778.96 -614.86,-1778.65 -621.65,-1777.64 -628.32,-1775.97 -634.78,-1773.66 -640.99,-1770.72 -646.88,-1767.19 -652.4,-1763.1 -657.49,-1758.49 -662.1,-1753.4 -666.19,-1747.88 -669.72,-1741.99 -672.66,-1735.78 -674.97,-1729.32 -676.64,-1722.65 -677.65,-1715.86 -677.96,-1709.55 -677.9,-1709 -677.9,881 -677.96,881.55 -677.65,887.86 -676.64,894.65 -674.97,901.32 -672.66,907.78 -669.72,913.99 -666.19,919.88 -662.1,925.4 -657.49,930.49 -652.4,935.1 -646.88,939.19 -640.99,942.72 -634.78,945.66 -628.32,947.97 -621.65,949.64 -614.86,950.65 -608.55,950.96 -608,950.9 -381,950.9 -380.45,950.96
VDD on VDD (split plane): -608,930.91 -381,930.91 -380.47,930.95 -375.4,930.66 -369.88,929.73 -364.49,928.17 -359.32,926.03 -354.41,923.32 -349.84,920.07 -345.66,916.34 -341.93,912.16 -338.68,907.59 -335.97,902.68 -333.83,897.51 -332.27,892.12 -331.34,886.6 -331.05,881.53 -331.09,881 -331.09,430.68 -331.08,430.59 -330.75,421.41 -329.76,412.17 -328.11,403.03 -325.81,394.04 -322.88,385.23 -319.33,376.65 -315.17,368.34 -310.43,360.36 -305.14,352.73 -299.31,345.5 -292.98,338.7 -286.19,332.37 -278.96,326.55 -271.33,321.25 -263.34,316.51 -255.04,312.36 -246.46,308.8 -237.65,305.87 -228.65,303.57 -219.51,301.93 -210.28,300.93 -201.1,300.61 -201,300.6 1101.76,300.6 1102.29,300.63 1107.36,300.35 1112.89,299.41 1118.27,297.86 1123.45,295.71 1128.35,293 1132.92,289.76 1137.1,286.03 1140.84,281.85 1144.08,277.28 1146.79,272.37 1148.94,267.19 1150.49,261.81 1151.43,256.28 1151.71,251.21 1151.68,250.68 1151.68,-1709 1151.84,-1711.47 1151.66,-1714.6 1150.73,-1720.12 1149.17,-1725.51 1147.03,-1730.68 1144.32,-1735.59 1141.07,-1740.16 1137.34,-1744.34 1133.16,-1748.07 1128.59,-1751.32 1123.68,-1754.03 1118.51,-1756.17 1113.12,-1757.73 1107.6,-1758.66 1102.53,-1758.95 1102,-1758.91 -317.92,-1758.91 -317.92,-999.08 -114,-999.08 -112.44,-998.77 -111.12,-997.88 -110.23,-996.56 -109.92,-995 -109.92,-802 -110.23,-800.44 -111.12,-799.12 -112.44,-798.23 -114,-797.92 -657.91,-797.92 -657.91,881 -657.95,881.53 -657.66,886.6 -656.73,892.12 -655.17,897.51 -653.03,902.68 -650.32,907.59 -647.07,912.16 -643.34,916.34 -639.16,920.07 -634.59,923.32 -629.68,926.03 -624.51,928.17 -619.12,929.73 -613.6,930.66 -608.53,930.95
BAT on VDD (split plane): -118.08,-990.92 -322,-990.92 -323.56,-991.23 -324.88,-992.12 -325.77,-993.44 -326.08,-995 -326.08,-1758.91 -608,-1758.91 -608.53,-1758.95 -613.6,-1758.66 -619.12,-1757.73 -624.51,-1756.17 -629.68,-1754.03 -634.59,-1751.32 -639.16,-1748.07 -643.34,-1744.34 -647.07,-1740.16 -650.32,-1735.59 -653.03,-1730.68 -655.17,-1725.51 -656.73,-1720.12 -657.66,-1714.6 -657.95,-1709.53 -657.91,-1709 -657.91,-806.08 -118.08,-806.08

## Keep-outs
Keep-Out Layer:
  circle w10: c-169.06,-554 r59.06
  circle w10: c-146.82,-1669.63 r62.99
  circle w10: c1073.65,180.76 r62.99
  circle w10: c-579.89,180.76 r62.99
  lines w8: 1191.76,-1709 1191.76,250.68 ccw(c1101.76,250.68) 1101.76,340.68 -201,340.68 cw(c-201,430.68) -291,430.68 -291,881 ccw(c-381,881) -381,971 -608,971 ccw(c-608,881) -698,881 -698,-1709 ccw(c-608,-1709) -608,-1799 1102,-1799 ccw(c1102,-1709) 1192,-1709

## Other copper
Top Layer:
  rectangle net NetD1_K: -493,-1071 -421,-904
  rectangle net BAT: -372,-969 -277,-897
  rectangle net BAT: -225,-881 -149,-834
  rectangle net BAT: -348,-927 -219,-834
  rectangle net VDD: -498,-583 -390,-526
  rectangle net VDD: -450,-553 -409,-480
  rectangle net VDD: 471,-753 585,-658
Bottom Layer:
  rectangle net VDD: 825,-656 888,-574
  rectangle net BAT: -344,-927 -157,-839
VDD (plane layer: these items are gaps in the copper):
  lines w8: -659,-802 -114,-802 -114,-995 -322,-995 -322,-1802 -311,-1802

## Silkscreen, mask and mechanical layers (free items; w line width, h text height)
Top Overlay:
  lines w8: -55,-1284 -55,-1239 ; 85,-1229 105,-1249 ; 893,-572 930,-572 ; 911,-584 911,-558 ; 1029,-1366 1056,-1366 1056,-1373
  text "+" at -348,-1765 h60
Bottom Overlay:
  lines w8: 1266,-3287 1273,-3287

## Text inside footprints (layer, text, board x,y; h text height)
MS621FE: Bottom Overlay "+" at 641,-700 h30 r180